# Altium PCB Driving_Circuit_One.PcbDoc
Units mil, origin at the board's own origin, x right, y up, seen from the top; angles counter-clockwise.
Board outline 10260 x 4000 mil, 2 copper layers (Top Layer, Bottom Layer); 10 components, 14 nets, 26 pads, 1 vias.
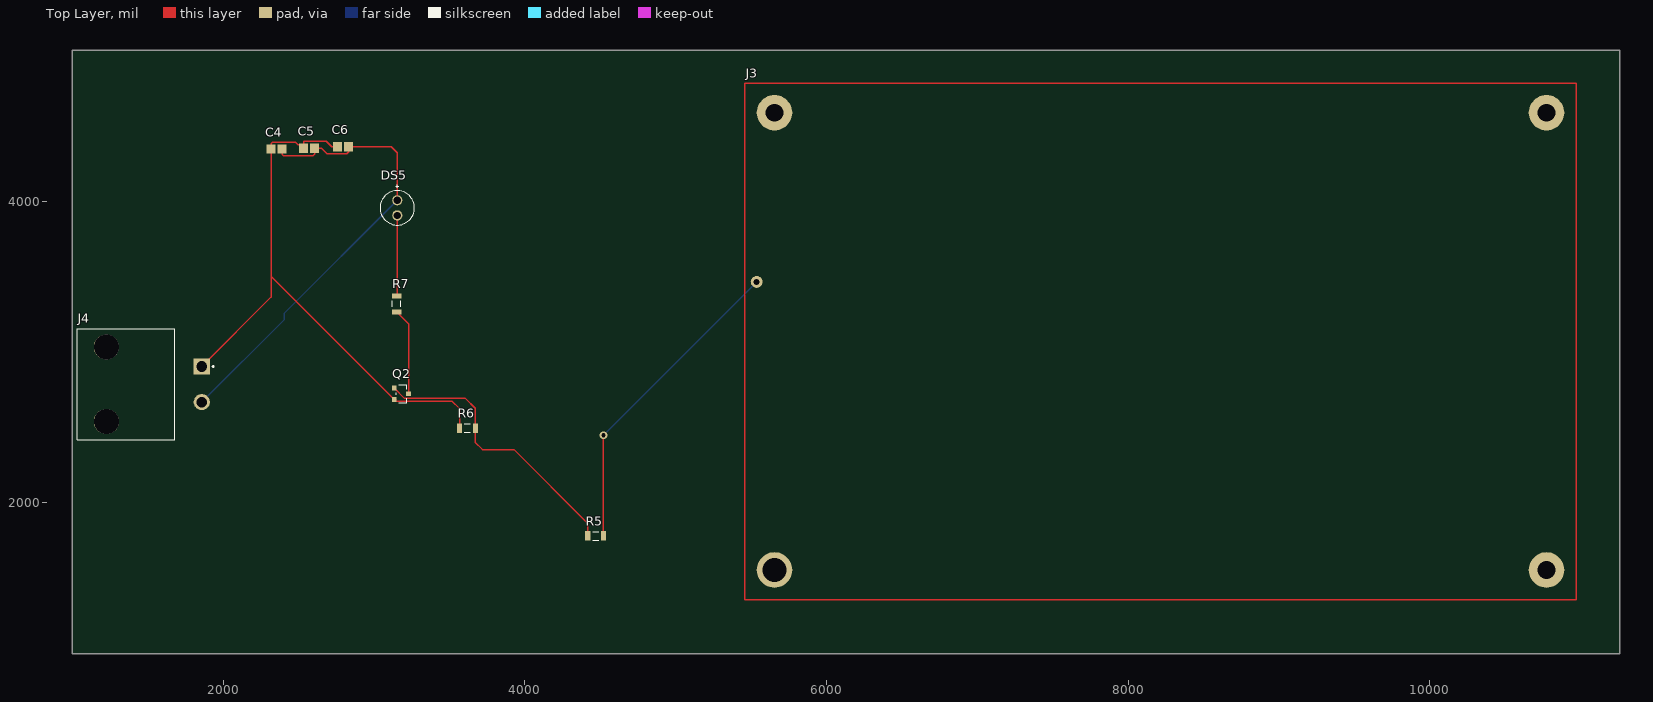
[diagram p0: Top Layer view]
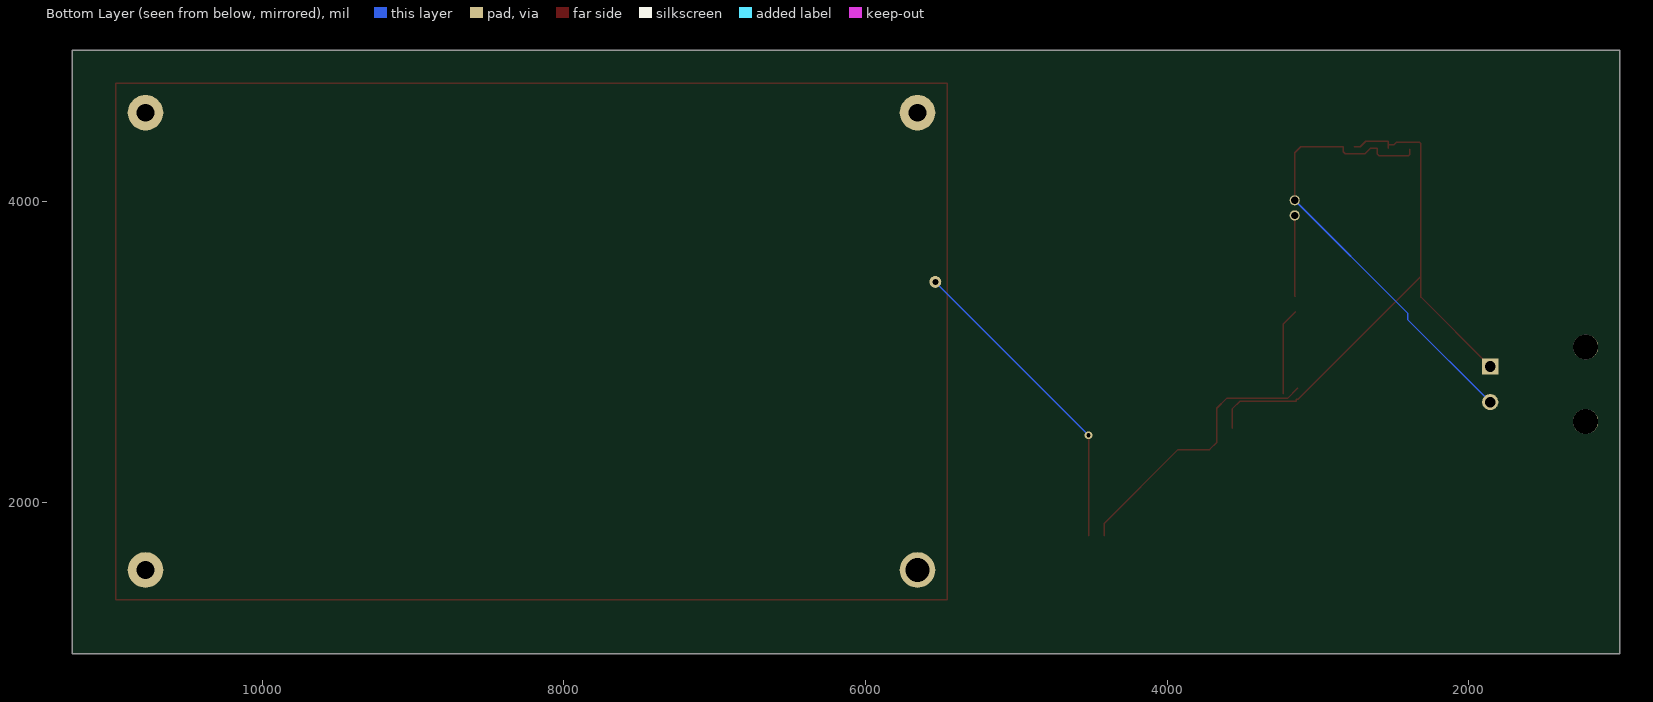
[diagram p1: Bottom Layer view, seen from below]

## Layer stack, top to bottom
Top Solder: solder mask 0.4, Solder Resist, Dk 3.5
Top Layer: signal copper 1.4
Dielectric 1: dielectric 12.6, FR-4, Dk 4.8
Bottom Layer: signal copper 1.4
Bottom Solder: solder mask 0.4, Solder Resist, Dk 3.5

## Board outline
1000,1000 11260,1000 11260,5000 1000,5000

## Design rules (kind name [scope] priority, off if disabled: settings)
Clearance [All] p1: gap=10 ignorepadtopadclearanceinfootprint=FALSE
HoleSize [All] p1: absolutevalues=TRUE maxlimit=170 minlimit=1 maxpercent=80.000 minpercent=20.000
PolygonConnect [All] p1: connectstyle=Relief reliefconductorwidth=10 reliefentries=4 polygonreliefangle="90 Angle" airgapwidth=10
RoutingVias [All] p1: holewidth=28 width=50 viastyle="Through Hole" minholewidth=28 minwidth=50 maxholewidth=28 maxwidth=50
SolderMaskExpansion [All] p1: expansion=0 istentingtop=FALSE
Width [All] p1: maxlimit=10 minlimit=10 preferedwidth=10
29 further rules are at their usual default settings.

## Components (designator, comment, footprint, x,y, rotation, side; value= is the part's Value field where it differs from the comment)
C4 "100uF" CAPC2013X145X48ML20T23 2355,4345 r0 top
C5 "1uF" CAPC2013X145X48ML20T23 2570,4350 r0 top
C6 "100nF" CAPC2013X145X48ML20T23 2796.42,4360 r0 top
DS5 "TSAL6200" VISH-TSAL6200 3155,3955 r270 top
J3 "PYNQZ2" PYNQZ2_board 8215,3070 r180 top
J4 "1-1969694-2" FP-1-1969694-2-MFG 1360,2785 r270 top
Q2 "AO3400A" FP-SOT23-MFG 3182.24,2722.6 r0 top
R5 "330" RESC3116X65X40LL10T20 4470,1780 r0 top
R6 "10k" RESC3116X65X40LL10T20 3620,2495 r0 top
R7 "47" RESC3116X65X40LL10T20 3150,3317.83 r90 top

## Footprints (in the part's own frame and the unit in brackets; to place one, negate y for a bottom-side part, rotate by r counter-clockwise, add the part's x,y. Pads: shape width x height; smd on the part's side, far side on the other; paste and mask are expansions set on the pad)
CAPC2013X145X48ML20T23 [mm] "Chip Capacitor, 2-Leads, Body 2.00x1.25mm, IPC Low Density"
  rect 1.5x1.55 smd: 1(-0.925,0) 2(0.925,0)
  body extent -1.1,-0.72 1.1,0.72, height 1.45
FP-1-1969694-2-MFG [mm]
  rect 2.73x2.73 hole 1.78 paste-2539.97 mask+0: 1(-3.005,12.67)
  round 2.73 hole 1.78 paste-2539.97 mask+0: 2(2.995,12.67)
  round 4.22 hole 4.22 unplated paste-2539.97 mask+0: ""(-6.275,-3.4) ""(6.275,-3.4)
  silkscreen extent -9.36,-8.28 9.36,14.71, body extent -9.47,-8.38 9.47,14.14, height 0.25
FP-SOT23-MFG [mm]
  rect 0.8x0.8 smd paste+0 mask+0: 1(-1.2,0.95) 2(-1.2,-0.95) 3(1.2,0)
  silkscreen extent -0.9,-1.55 0.9,1.55, body extent -1.7,-1.78 1.7,1.78, height 0.25
PYNQZ2_board [mm]
  round 6 hole 3: 0(-65,-38.5) 0(-65,38.5) 0(65,-38.5)
  round 6 hole 4: 0(65,38.5)
  round 2 hole 1: 1(68,-10)
  Top Layer lines w0.254: 70,43.5 70,-43.5 -70,-43.5 -70,43.5 70,43.5
RESC3116X65X40LL10T20 [mm] "Chip Resistor, 2-Leads, Body 3.10x1.60mm, IPC High Density"
  rect 0.85x1.6 smd: 1(-1.325,0) 2(1.325,0)
  silkscreen extent -0.5,-0.7 0.5,0.7, body extent -1.6,-0.85 1.6,0.85, height 0.65
VISH-TSAL6200 [mm] "THD, 2-Leads, Dia 5.8mm, Pitch 2.54mm"
  round 1.7 hole 1.2: 1(-1.27,0) 2(1.27,0)
  silkscreen extent -3.9,-2.9 2.9,2.9

## Part data
C4 C5 C6: library part CMP-2007-03205-1, Manufacturer=Vitramon, Part Number=VJ0805Y682KXAMT
DS5: library part CMP-2000-07327-1, "High Power Infrared Emitting Diode, GaAlAs, MQW, 1.35 V, 100 mA, -40 to 85 degC, 2-Pin THD, RoHS, Bulk", Forward Current=100mA, Forward Voltage=3V, Manufacturer=Vishay, Operating Temp Range=-40Cto85C, Operating Temperature Classification=Industrial, Package Description="2-Pin Through Hole Device, Dia 5.8 mm, Pitch 2.54 mm", Package Type=T-13/4, Power Dissipation=160W, Reverse Voltage=5V, Chip Material=GaAlAs, Datasheet URL=http://www.vishay.com/docs/81010/tsal6200.pdf, Datasheet Version="Rev. 2.4, 03/2014", DELETED=Compliant, High Brightness=Yes, Lens Dimensions=5x5x7.7mm, Lens Type=Colored, Lum Intensity=500mW/srmcd, Luminous Intensity=500mW/sr, Main Category=IrLED, Manufacturer URL=http://www.vishay.com/, Mounting=ThroughHole, Mounting Technology=ThroughHole, Number of  Elements=1, Package Reference=TSAL6200, Packaging=Bulk, Peak Wavelength=950nm, Pin Count=2, Product Depth (mm)=5.8mm, Product Height (mm)=8.7mm, Product Length (mm)=5.8mm, Rad Hardened=No, Shape Type=Circular, Test Current (It)=100mA, Type=IrLED, Viewing Angle=34deg
J4: library part CMP-03373-000004-1, "CONN HEADER R/A 2POS 6MM", Contact Current Rating=19.5A, Flammability Rating="UL94 V-0", Housing Color=Grey, Max Operating Temperature=150°C, Min Operating Temperature=-55°C, Number of Power Positions=2, Approvals=VDE, Circuit Application=Power, Connector System=Wire-to-Board, Connector Type=Tab, Contact Material="Copper Alloy", Contact Plating=Tin, Contact Retention="Yes (With)", Housing Material=Nylon, Mating Retention="Yes (With)", Number of Positions=2, Number of Rows=1, Packaging=Carton, PCB Mount Alignment="Yes (With)", PCB Mounting Orientation="Right Angle", Pitch=6mm, Sealable="No (Without)", Termination="Through Hole", VDE Tested=Yes
Q2: library part CMP-83955-000006-1, "MOSFET N-CH 30V 5.7A SOT23", Case/Package=SOT-23, Continuous Drain Current (ID)=5.7A, Drain to Source Voltage (Vdss)=30V, Gate to Source Voltage (Vgs)=12V, Input Capacitance=630pF, Max Operating Temperature=150°C, Max Power Dissipation=1.4W, Min Operating Temperature=-55°C, Lead Free="Lead Free", Mount="Surface Mount", Number of Elements=1, Number of Pins=3, Packaging="Tape and Reel", Power Dissipation=1.4W, Radiation Hardening=No, Rds On Max=26.5mR
R5 R6 R7: library part CMP-2003-04964-1, Manufacturer=Yageo, Part Number=RC1206FR-10750RL

## Via types
v1: diameter 50, hole 28, Top Layer to Bottom Layer, 1 vias

## Nets (pads, with @x,y where several pads share a name; then routed paths per layer and width w, separated by ;. In a path a pad name is that pad's centre, name@x,y a point inside that pad or via, vN(x,y) a via of type N, cw(c..) or ccw(c..) an arc to the next point about the centre after c; other vN are vias at no path point)
NetC1_1: 
NetC1_2: 
NetC4_1: C4.1 C5.1 C6.1 J4.1 Q2.2 R6.1 | length 3931.5
  Top Layer w10: J4.1 2318.58,3363.07 2318.58,3501.61 ; C5.1 C5.1@2533.58,4372 ; C6.1 2720,4360 2684,4396 2533.58,4396 C5.1@2533.58,4372 ; R6.1 3567.83,2624.02 3520,2671.85 3145.75,2671.85 3145.75,2685.2 Q2.2 2318.58,3501.61 ; 2318.58,3501.61 C4.1 2318.58,4380 2329.58,4391 2479,4391 2498,4372 C5.1@2533.58,4372
NetC4_2: C4.2 C5.2 C6.2 DS5.1 J4.2 | length 3106.6
  Top Layer w10: C4.2 2391.42,4310 2401.42,4300 2596.42,4300 2606.42,4310 C5.2 2653,4350 2689,4314 2820,4314 2832.83,4326.83 C6.2 3115,4360 3155,4320 DS5.1
  Bottom Layer w10: J4.2 2407,3215.27 2407,3257 DS5.1
NetDS1_2: 
NetDS2_2: 
NetDS3_2: 
NetDS4_2: 
NetDS5_2: DS5.2 R7.2 | length 540
  Top Layer w10: R7.2 3155,3370 DS5.2
NetJ2_1: 
NetJ3_1: J3.1 R5.2 | length 2104.4
  Top Layer w10: R5.2 v1(4522.17,2448.03)
  Bottom Layer w10: v1(4522.17,2448.03) J3.1
NetQ1_1: 
NetQ2_1: Q2.1 R5.1 R6.2 | length 1869.9
  Top Layer w10: Q2.1 3203.15,2691.85 3607.15,2691.85 3672.17,2626.83 R6.2 3672.17,2399.83 3720,2352 3928,2352 4417.83,1862.17 R5.1
NetQ2_3: Q2.3 R7.1 | length 576
  Top Layer w10: R7.1 3229.49,3186.18 Q2.3
pads on no net: J3.0 J4.